# EAGLE board board (EAGLE 7.6.0)

Size 56.82 x 53.33 mm. Coordinates in mm from the lower left corner, seen from the top.
Outline: 0,0 56.82,0 56.82,53.33 0,53.33 0,0
Copper layers (1*16): Top 0.035mm / dielectric 1.5mm / Bottom 0.035mm
Design rules "default": minimum track width 10mil, minimum drill 24mil, track to track 8mil, track to pad 8mil, pad to pad 8mil, via to via 8mil, smd to smd 8mil, copper to edge 40mil, drill to drill 8mil, minimum pad ring 10mil, minimum via ring 8mil, stop-mask expansion 4mil, vias tented up to drill 0mil, thermal gap 10mil

## Footprints (pad centres in the part's own frame; a part is rotated, then mirrored left to right if it is on the bottom)
DC-POWER = drill 0.889 pad 2.54 octagon: + 0,2.54; - 0,-2.54
2P-2.54-65/35MIL = drill 0.889 pad 1.651 square: 1 0,1.27 | drill 0.889 pad 1.651: 2 0,-1.27
0207/10 = drill 0.813 octagon: 1 -5.08,0; 2 5.08,0

## Placement (x,y rotation side)
BAT2  [DC-POWER]  5,10.08 0 top
BAT3  [DC-POWER]  5,22.78 0 top
BAT4  [DC-POWER]  5,35.48 0 top
BAT5  [DC-POWER]  5,48.18 0 top
BAT6  [DC-POWER]  5,60.88 0 top  (outside the outline)
BAT7  [DC-POWER]  5,73.58 0 top  (outside the outline)
BAT8  [DC-POWER]  5,86.28 0 top  (outside the outline)
BAT9  [DC-POWER]  5,98.98 0 top  (outside the outline)
BAT10  [DC-POWER]  5,111.68 0 top  (outside the outline)
BAT11  [DC-POWER]  5,124.38 0 top  (outside the outline)
M1  [2P-2.54-65/35MIL]  5,149.78 0 top  (outside the outline)
Meter1  [DC-POWER]  5,162.48 0 top  (outside the outline)
Meter2  [DC-POWER]  5,175.18 0 top  (outside the outline)
R1  100‎Ω  [0207/10]  5,137.08 0 top  (outside the outline)

## Library data of the parts
BAT2-BAT11 M1 Meter1 Meter2 R1 = AUTODESK_CIRCUITS_BREADBOARD

## Nets
N$1: BAT2.- BAT3.+
N$2: BAT3.- BAT4.+
N$3: BAT4.- BAT5.+
N$4: BAT5.- BAT6.+
N$5: BAT6.- BAT7.+
N$6: BAT7.- BAT8.+
N$7: BAT8.- BAT9.+
N$8: BAT9.- BAT10.+
N$9: BAT10.- BAT11.+
N$10: BAT2.+ R1.1
N$11: Meter1.+ R1.2
N$12: M1.2 Meter1.- Meter2.+
N$13: BAT11.- M1.1 Meter2.-

## Tracks (layer width: path | path; a pad name or v marks a point on that pad's centre or on a via)
N$1  (1 unrouted)
N$2  (1 unrouted)
N$3  (1 unrouted)
N$4  (1 unrouted)
N$5  (1 unrouted)
N$6  (1 unrouted)
N$7  (1 unrouted)
N$8  (1 unrouted)
N$9  (1 unrouted)
N$10  (1 unrouted)
N$11  (1 unrouted)
N$12  (2 unrouted)
N$13  (2 unrouted)